# Altium PCB PCB1.pcbdoc (part 1 of 3)
Units mil, origin at the board's own origin, x right, y up, seen from the top; angles counter-clockwise.
Board outline 3947.03 x 3946.03 mil, 2 copper layers (Top Layer, Bottom Layer); 98 components, 123 nets, 499 pads, 187 vias.
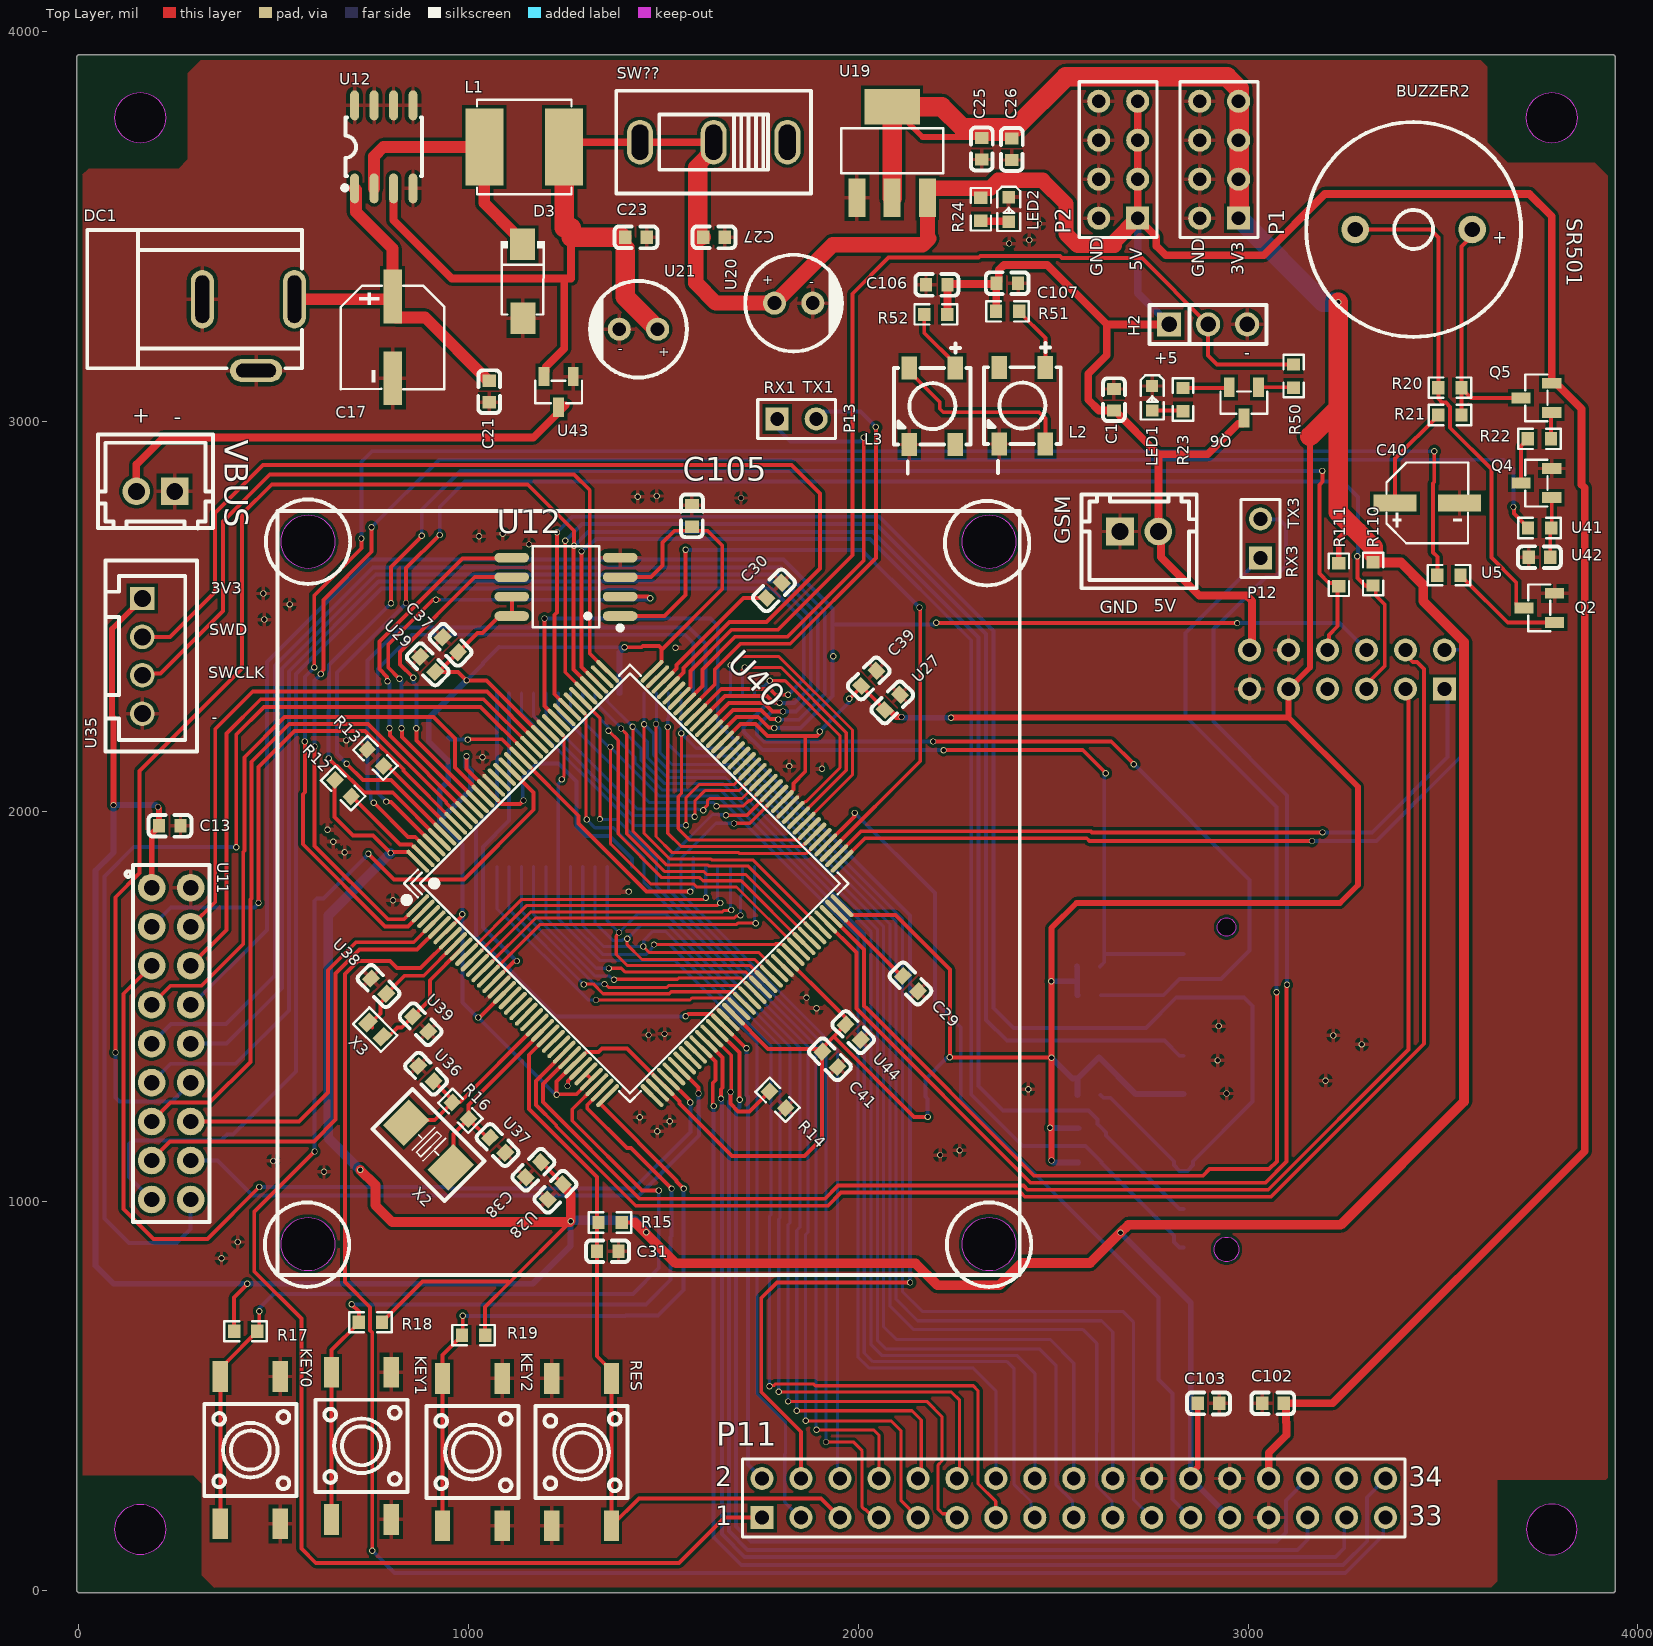
[diagram p0: Top Layer view]
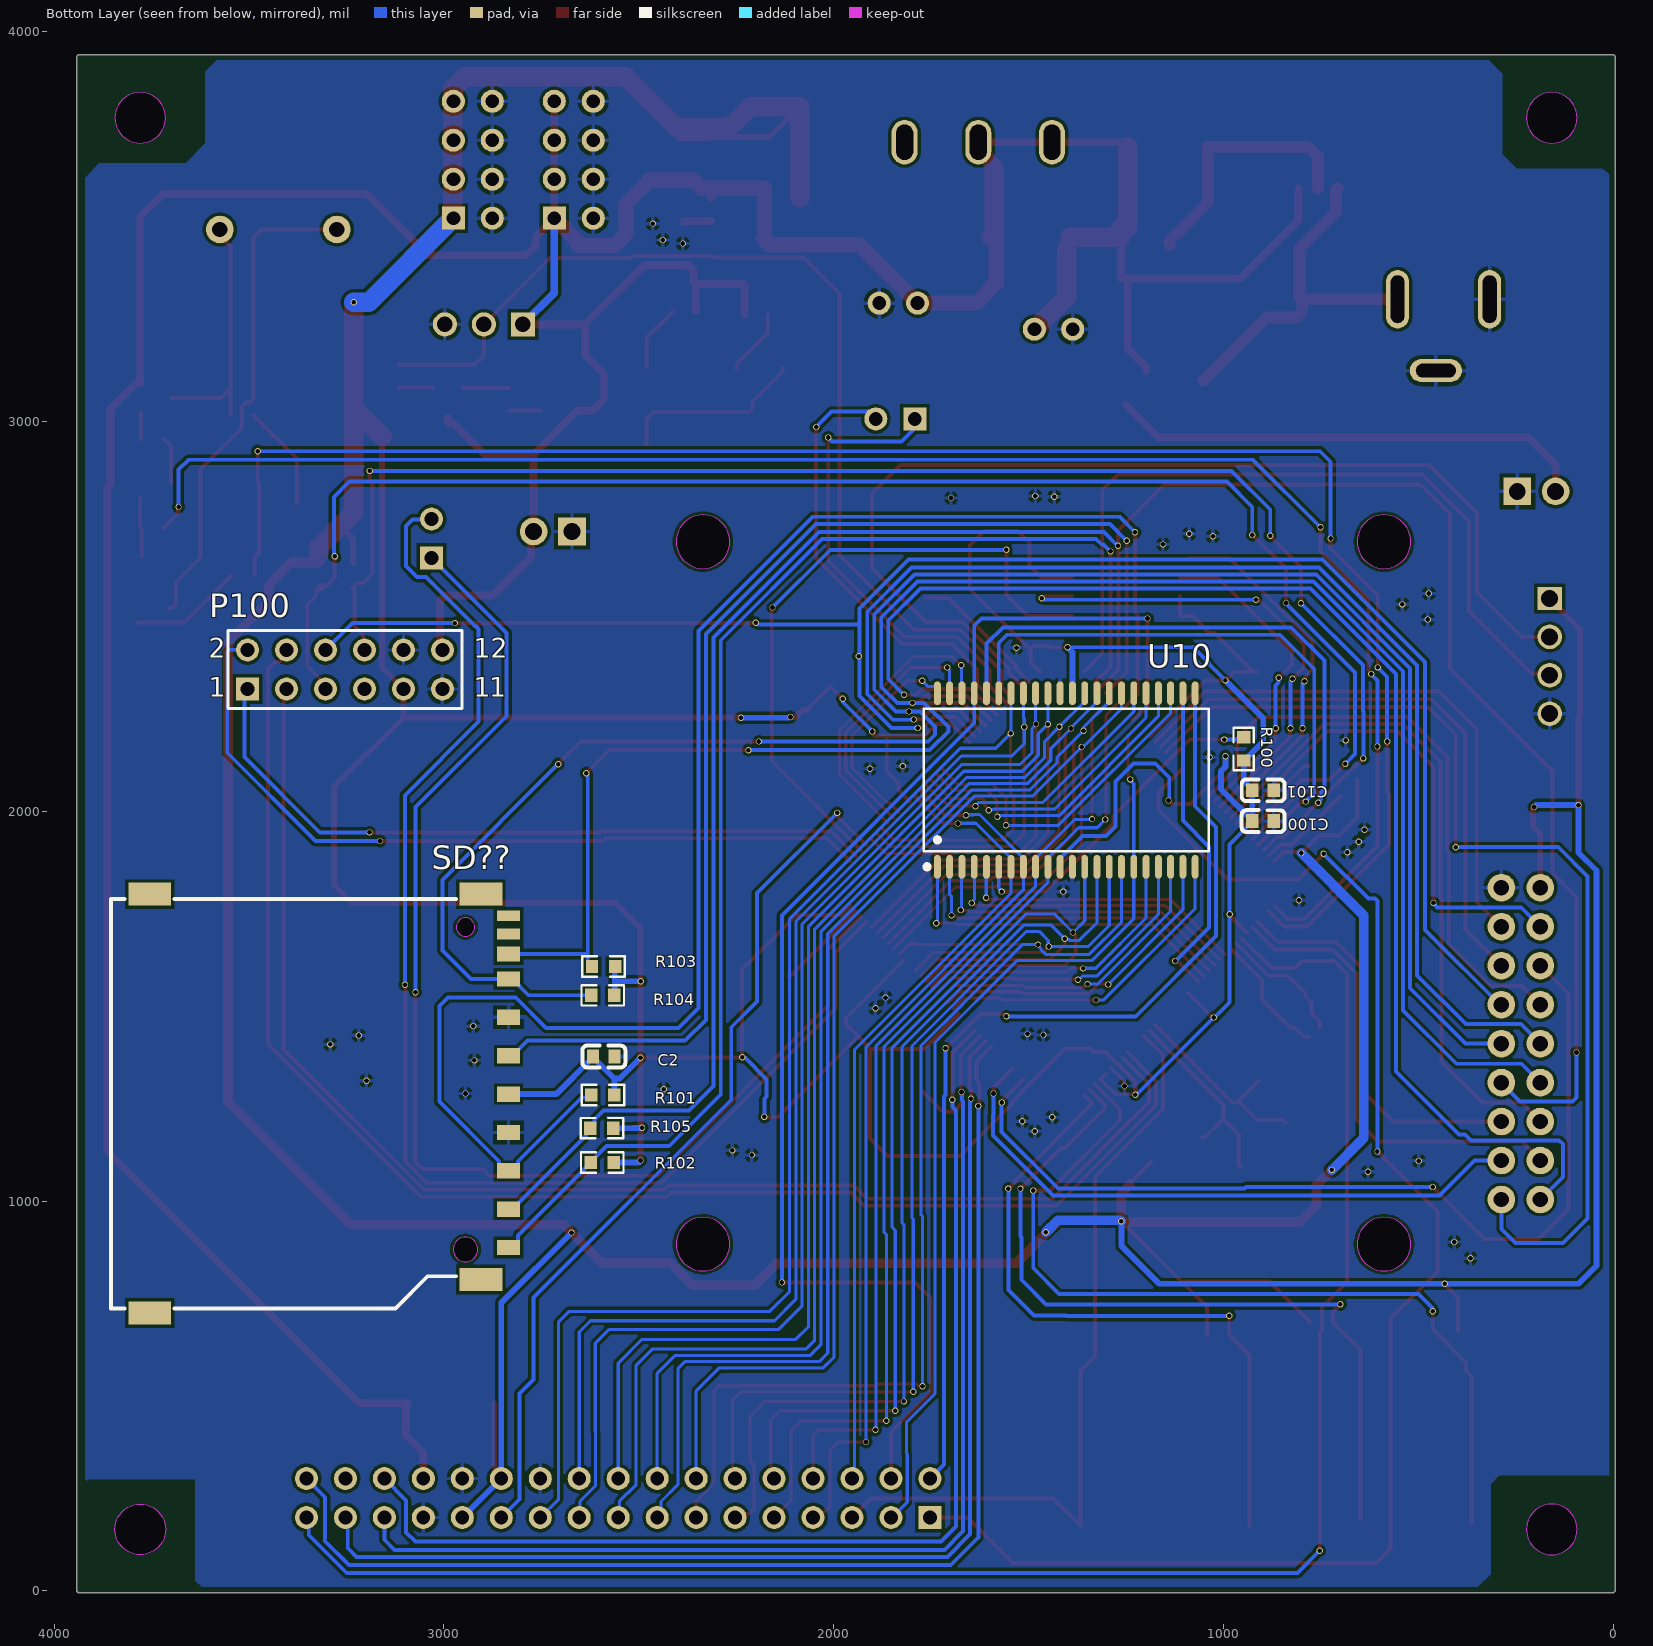
[diagram p1: Bottom Layer view, seen from below]

## Layer stack, top to bottom
Top Solder Mask Layer: solder mask 0.4, Solder Resist, Dk 3.5
Top Layer: signal copper 1.4
Dielectric1: dielectric 12.6, FR-4, Dk 4.8
Bottom Layer: signal copper 1.4
Bottom Solder Mask Layer: solder mask 0.4, Solder Resist, Dk 3.5

## Board outline
-3.01,-3.01 cw(c0,1) -5.01,1 -5.01,3936 cw(c0,3936) 0,3941.02 3937,3941.02 cw(c3937,3936) 3942.02,3936 3942.02,0 cw(c3937,0) 3937,-5.01 1,-5.01 cw(c1,0)
cut-out: 157.48,3714.57 cw(c157.48,3779.53) 92.52,3779.53 cw(c157.48,3779.53) 157.48,3844.49 cw(c157.48,3779.53) 222.44,3779.53 cw(c157.48,3779.53)
cut-out: 3779.53,3714.57 cw(c3779.53,3779.53) 3714.57,3779.53 cw(c3779.53,3779.53) 3779.53,3844.49 cw(c3779.53,3779.53) 3844.49,3779.53 cw(c3779.53,3779.53)
cut-out: 3714.57,157.48 ccw(c3779.53,157.48) 3779.53,92.52 ccw(c3779.53,157.48) 3844.49,157.48 ccw(c3779.53,157.48) 3779.53,222.44 ccw(c3779.53,157.48)
cut-out: 157.48,92.52 cw(c157.48,157.48) 92.52,157.48 cw(c157.48,157.48) 157.48,222.44 cw(c157.48,157.48) 222.44,157.48 cw(c157.48,157.48)
cut-out: 588.05,2623.06 cw(c588.05,2691.96) 519.16,2691.96 cw(c588.05,2691.96) 588.05,2760.86 cw(c588.05,2691.96) 656.95,2691.96 cw(c588.05,2691.96)
cut-out: 2335.57,2623.06 cw(c2335.57,2691.96) 2266.68,2691.96 cw(c2335.57,2691.96) 2335.57,2760.86 cw(c2335.57,2691.96) 2404.47,2691.96 cw(c2335.57,2691.96)
cut-out: 2335.57,820.54 cw(c2335.57,889.44) 2266.68,889.44 cw(c2335.57,889.44) 2335.57,958.34 cw(c2335.57,889.44) 2404.47,889.44 cw(c2335.57,889.44)
cut-out: 588.05,820.54 cw(c588.05,889.44) 519.16,889.44 cw(c588.05,889.44) 588.05,958.34 cw(c588.05,889.44) 656.95,889.44 cw(c588.05,889.44)

## Design rules (kind name [scope] priority, off if disabled: settings)
Clearance [All] p1: gap=8 ignorepadtopadclearanceinfootprint=TRUE except(0: Arc-Hole Track-Hole SMDPad-Hole THPad-Hole Via-Hole Fill-Hole Poly-Hole Region-Hole Text-Hole)
FanoutControl Fanout_Default [All] p1: bgadir=Out bgaviamode=Centered fanoutstyle=Auto fanoutdirection=Alternating viagrid=1 // Fanout_Default (Default Rule)
FanoutControl Fanout_Small [(CompPinCount < 5)] p2: bgadir=Out bgaviamode=Centered fanoutstyle=Auto fanoutdirection=OutThenIn viagrid=1 // Fanout_Small (Default Rule)
FanoutControl Fanout_LCC [IsLCC] p4: bgadir=Out bgaviamode=Centered fanoutstyle=Auto fanoutdirection=Alternating viagrid=1 // Fanout_LCC (Default Rule)
FanoutControl Fanout_BGA [IsBGA] p5: bgadir=Out bgaviamode=Centered fanoutstyle=Auto fanoutdirection=Alternating viagrid=1 // Fanout_BGA (Default Rule)
HoleSize [All] p1: absolutevalues=TRUE maxlimit=157.48 minlimit=11.81 maxpercent=80.000 minpercent=20.000
MinimumSolderMaskSliver [All] p1: minsoldermaskwidth=1.97
PolygonConnect [All] p1: connectstyle=Relief reliefconductorwidth=10 reliefentries=4 polygonreliefangle="90 Angle" airgapwidth=10
RoutingVias [All] p1: holewidth=12 width=16 viastyle="Through Hole" minholewidth=12 minwidth=16 maxholewidth=20 maxwidth=20
SilkToSilkClearance [All] p1: silktosilkclearance=6
SilkToSolderMaskClearance [IsPad] p1: minsilkscreentomaskgap=0 clearancetoexposedcopper=TRUE
SolderMaskExpansion [All] p1: expansion=4 istentingtop=FALSE
UnRoutedNet [All] p1: checkbadconnections=TRUE
Width [All] p1: maxlimit=50 minlimit=8 preferedwidth=10
21 further rules are at their usual default settings.

## Classes and differential pairs
component class 4_POW.schdoc: C17 C21 C23 C25 C26 C27 D3 DC1 GSM L1 LED2 P1 P2 R24 SW?? U12 U19 U20 U21 U43 VBUS
component class 3_语音模块.schdoc: C100 C101 C102 C103 C105 P11 P100 R100 R110 R111 U10 U12
component class 2_MCU.schdoc: C29 C30 C31 C37 C38 C39 C41 P12 P13 R12 R13 R14 R15 R16 RES U27 U28 U29 U35 U36 U37 U38 U39 U40 U44 X2 X3
component class 1_Board.schdoc: BUZZER2 C1 C2 C13 C40 C106 C107 H2 KEY0 KEY1 KEY2 L2 L3 LED1 Q2 Q4 Q5 Q6 R17 R18 R19 R20 R21 R22 R23 R50 R51 R52 R101 R102 R103 R104 R105 SD?? U5 U11 U41 U42

## Components (designator, comment, footprint, x,y, rotation, side; value= is the part's Value field where it differs from the comment)
BUZZER2 "4000Hz" BUZ-TH_BD14.0-P7.60-D0.7-FD 3425,3493 r180 top
C1 "100nF" C0603 2656,3056 r270 top
C2 "100nF" C0603 2590,1371 r0 bottom
C13 "100nF" C0603 233.44,1963 r180 top
C17 "470uF" CAP-SMD_BD6.3-L6.6-W6.6-LS7.6-RD 805,3216 r270 top
C21 "100nF" C0603 1053,3077 r90 top
C23 "100nF" C0603 1429.44,3473 r180 top
C25 "10uF" C0603 2317,3700 r90 top
C26 "100nF" C0603 2394,3698.87 r90 top
C27 "100nF" C0603 1629.56,3473 r180 top
C29 "2.2uF" C0603 2134,1558 r315 top
C30 "2.2uF" C0603 1784,2567 r45 top
C31 "100nF" C0603 1357.08,871.13 r0 top
C37 "100nF" C0603 953.58,2427.49 r135 top
C38 "100nF" C0603 1166.1,1080.34 r225 top
C39 "100nF" C0603 2027,2341 r45 top
C40 "RST47UF16V034" CAP-SMD_BD5.0-L5.3-W5.3-LS6.0-FD 3460,2790.83 r0 top
C41 "100nF" C0603 1927.51,1363.49 r315 top
C100 "100nF" C0603 898.56,1975 r0 bottom
C101 "100nF" C0603 898.44,2054 r0 bottom
C102 "100nF" C0603 3064,481 r0 top
C103 "100nF" C0603 2898.44,481 r180 top
C105 "100nF" C0603 1573,2758 r270 top
C106 "100nF" C0603 2201.44,3351 r180 top
C107 "100nF" C0603 2382.44,3355 r0 top
D3 "SS34" SMA_L4.3-W2.6-LS5.0-RD 1139,3360 r270 top
DC1 "DC-005-A200" DC-IN-TH_DC-005-A200 435.1,3222.45 r0 top
GSM "ZX-XH2.54-2PZZ" CONN-TH_2P-P2.50_HX25003-2A 2720.79,2718 r0 top
H2 "PM254V-11-03-H85" HDR-TH_3P-P2.54-V-F 2897.68,3249.43 r0 top
KEY0 "K2-6639SP-C4SC-04" KEY-SMD_4P-L6.0-W6.0-P3.90-LS10.0 440,360.89 r270 top
KEY1 "K2-6639SP-C4SC-04" KEY-SMD_4P-L6.0-W6.0-P3.90-LS10.0 725.22,372.02 r270 top
KEY2 "K2-6639SP-C4SC-04" KEY-SMD_4P-L6.0-W6.0-P3.90-LS10.0 1010,355.89 r270 top
L1 "68uH" IND-SMD_L6.0-W6.0_SWPA6045S 1143,3704.65 r0 top
L2 "RGB" RGB 2421,3041 r180 top
L3 "RGB" RGB 2189.95,3039.57 r180 top
LED1 "NCD0603G1" LED0603-RD 2754,3060 r270 top
LED2 "NCD0603G1" LED0603-RD 2386,3544 r270 top
P1 "Header 4X2" HDR2X4 2976,3522 r90 top
P2 "Header 4X2" HDR2X4 2717,3522 r90 top
P11 "TFTLCD" HDR2X17 1753,188 r0 top
P12 "Header 2" HDR1X2 3032,2650 r90 top
P13 "Header 2" HDR1X2 1792,3007 r0 top
P100 "Header 6X2" HDR2X6 3504,2314 r180 bottom
Q2 "SS8050" SOT-23-3_L2.9-W1.3-P1.90-LS2.4-BR 3747.37,2522 r0 top
Q4 "SS8050" SOT-23-3_L2.9-W1.3-P1.90-LS2.4-BR 3739.93,2842.41 r0 top
Q5 "SS8550" SOT-23-3_L2.9-W1.3-P1.90-LS2.4-BR 3739.93,3060.87 r0 top
Q6 "SS8050" SOT-23-3_L2.9-W1.3-P1.90-LS2.4-BR 2989.59,3048.67 r90 top
R12 "0Ω" R0603 678,2059 r135 top
R13 "10kΩ" R0603 761.05,2137.22 r135 top
R14 "10kΩ" R0603 1793,1260 r315 top
R15 "10kΩ" R0603 1363,945 r0 top
R16 "1MΩ" R0603 979.09,1231.73 r135 top
R17 "10kΩ" R0603 428,666 r180 top
R18 "10kΩ" R0603 748.34,689 r0 top
R19 "10kΩ" R0603 1013,656 r0 top
R20 "2.2kΩ" R0603 3518,3087 r0 top
R21 "330Ω" R0603 3518,3017 r0 top
R22 "1kΩ" R0603 3747.75,2955.87 r0 top
R23 "1kΩ" R0603 2833.24,3056.5 r90 top
R24 "1.5kΩ" R0603 2314.55,3544.87 r90 top value=1kΩ
R50 "1kΩ" R0603 3117,3117 r90 top
R51 "1kΩ" R0603 2383,3283 r180 top
R52 "1kΩ" R0603 2199,3275 r0 top
R100 "10kΩ" R0603 948,2160 r90 bottom
R101 "47k" R0603 2592.34,1272 r180 bottom value=2kΩ
R102 "47k" R0603 2594,1099 r180 bottom value=2kΩ
R103 "47k" R0603 2590.66,1602 r180 bottom value=2kΩ
R104 "47k" R0603 2592.66,1528 r180 bottom value=2kΩ
R105 "47k" R0603 2595,1187 r180 bottom value=2kΩ
R110 "4.7kΩ" R0603 3321,2609 r90 top
R111 "4.7kΩ" R0603 3233,2607 r90 top
RES "K2-6639SP-C4SC-04" KEY-SMD_4P-L6.0-W6.0-P3.90-LS10.0 1290,355.89 r270 top
SD?? "SD-112" PCBComponent_1 3294.81,1250 r270 bottom
SW?? "SS12D10G4 071" 3PINSW 1629.01,3717 r180 top
U5 "2kΩ" R0603 3515.62,2605.87 r180 top
U10 "IS62WV51216BLL-55TLI" SRAM 1732.98,2303 r180 bottom
U11 "PM254-2-09-Z-8.5" HDR-TH_18P-P2.54-V-F-R2-C9-S2.54 237,1404 r270 top
U12 "W25Q128JVSIQ" eeprom 1250,2576 r90 top
U12 "XL1509-5.0E1" SOIC-8_L5.0-W4.0-P1.27-LS6.0-BL 782.53,3704.87 r0 top
U19 "AMS1117-3.3" SOT-223-3_L6.5-W3.4-P2.30-LS7.0-BR 2087,3691 r270 top
U20 "10uF" CAP-TH_BD6.3-P2.50-D0.5-FD 1834,3304 r0 top
U21 "10uF" CAP-TH_BD6.3-P2.50-D0.5-FD 1436,3237 r180 top
U27 "10uF" C0603 2087.51,2279.51 r45 top
U28 "10uF" C0603 1222.67,1023.77 r225 top
U29 "10uF" C0603 895.3,2377.35 r135 top
U35 "ZX-XH2.54-4PZZ" CONN-TH_4P-P2.50_4PIN 163,2398.36 r270 top
U36 "18pF" C0603 890.71,1327.19 r135 top
U37 "18pF" C0603 1074.55,1143.35 r315 top
U38 "18pF" C0603 769.11,1551.36 r315 top
U39 "18pF" C0603 876.8,1454.23 r135 top
U40 "STM32F407ZET6" LQFP-144_L20.0-W20.0-P0.50-LS22.0-BL 1414,1815 r315 top locked
U41 "2kΩ" R0603 3748,2727 r180 top
U42 "10nF" C0603 3748,2652 r0 top
U43 "SI2301-ZE" SOT-23-3_L2.9-W1.3-P1.90-LS2.4-BR 1231,3076 r90 top
U44 "10uF" C0603 1986.94,1433.19 r315 top
VBUS "ZX-XH2.54-2PZZ" CONN-TH_2P-P2.50_HX25003-2A 196.79,2821 r180 top
X2 "8MHz" OSC-SMD_L5.0-W3.2 897.27,1143.85 r135 top
X3 "-" OSC-SMD_2P-L1.6-W1.0 760.31,1439.95 r315 top

## Footprints (in the part's own frame and the unit in brackets; to place one, negate y for a bottom-side part, rotate by r counter-clockwise, add the part's x,y. Pads: shape width x height; smd on the part's side, far side on the other; paste and mask are expansions set on the pad)
3PINSW [mm]
  oval 1.7x2.9 hole 1.1 slot 2.3 at 90 deg paste+0 mask+0.05: 1(-4.8,0) 2(0,0) 3(4.8,0)
  silkscreen extent -6.35,-3.35 6.35,3.35
BUZ-TH_BD14.0-P7.60-D0.7-FD [mm]
  round 1.8 hole 1: 1(-3.81,0) 2(3.81,0)
  silkscreen extent -7,-7 7,7
C0603 [mm]
  rect 0.8x0.9 smd: 1(-0.7,0) 2(0.7,0)
  silkscreen extent -1.41,-0.71 1.39,0.72
CAP-SMD_BD5.0-L5.3-W5.3-LS6.0-FD [mm]
  rect 2.8x1.1 smd: 1(-2.1,0) 2(2.1,0)
  silkscreen extent -2.66,-2.62 2.66,2.65
CAP-SMD_BD6.3-L6.6-W6.6-LS7.6-RD [mm]
  rect 3.5x1.2 smd: 1(-2.67,0) 2(2.67,0)
  silkscreen extent -3.38,-3.38 3.38,3.38
CAP-TH_BD6.3-P2.50-D0.5-FD [mm]
  round 1.5 hole 0.9 paste+0 mask+0.05: 1(-1.25,0) 2(1.25,0)
  silkscreen extent -3.15,-3.15 3.21,3.15
CONN-TH_2P-P2.50_HX25003-2A [mm]
  rect 1.8x1.8 hole 1.1 paste+0 mask+0.05: 1(-1.25,0)
  round 1.8 hole 1.1 paste+0 mask+0.05: 2(1.25,0)
  silkscreen extent -3.75,-3.7 3.75,2.41
CONN-TH_4P-P2.50_4PIN [mm]
  rect 1.524x1.6 hole 1.1: 1(-3.75,0)
  round 1.6 hole 1.1: 2(-1.25,0) 3(1.25,0) 4(3.75,0)
  silkscreen extent -6.22,-2.41 6.22,3.56
DC-IN-TH_DC-005-A200 [mm]
  oval 1.5x3.8 hole 0.9 slot 3.1 at 90 deg: 1(3,2.325) 2(-3,2.325)
  oval 3.4x1.5 hole 0.9 slot 2.6 at 0 deg: 3(0.5,-2.325)
  silkscreen extent -10.5,-2.17 3.5,6.83
eeprom [mm]
  oval 0.63x2.25 smd: 1(-1.905,-3.53) 2(-0.635,-3.53) 3(0.635,-3.53) 4(1.905,-3.53) 5(1.905,3.53) 6(0.635,3.53) 7(-0.635,3.53) 8(-1.905,3.53)
  silkscreen extent -2.82,-3.68 2.64,2.18
HDR1X2 [mm] "Connector; Header; 2 Position"
  rect 1.5x1.5 hole 0.9: 1(0,0)
  round 1.5 hole 0.9: 2(2.54,0)
  silkscreen extent -1.27,-1.27 3.81,1.27
HDR2X4 [mm] "Connector; Header; 4x2 Position"
  rect 1.5x1.5 hole 0.9: 1(0,0)
  round 1.5 hole 0.9: 2(0,2.54) 3(2.54,0) 4(2.54,2.54) 5(5.08,0) 6(5.08,2.54) 7(7.62,0) 8(7.62,2.54)
  silkscreen extent -1.27,-1.27 8.89,3.81
HDR2X6 [mm] "Connector; Header; 6x2 Position"
  rect 1.5x1.5 hole 0.9: 1(0,0)
  round 1.5 hole 0.9: 2(0,2.54) 3(2.54,0) 4(2.54,2.54) 5(5.08,0) 6(5.08,2.54) 7(7.62,0) 8(7.62,2.54) 9(10.16,0) 10(10.16,2.54) 11(12.7,0) 12(12.7,2.54)
  silkscreen extent -1.27,-1.27 13.97,3.81
HDR2X17 [mm] "Connector; Header; 17x2 Position"
  rect 1.5x1.5 hole 0.9: 1(0,0)
  round 1.5 hole 0.9: 2(0,2.54) 3(2.54,0) 4(2.54,2.54) 5(5.08,0) 6(5.08,2.54) 7(7.62,0) 8(7.62,2.54) 9(10.16,0) 10(10.16,2.54) 11(12.7,0) 12(12.7,2.54) 13(15.24,0) 14(15.24,2.54) 15(17.78,0) 16(17.78,2.54) 17(20.32,0) 18(20.32,2.54) 19(22.86,0) 20(22.86,2.54) 21(25.4,0) 22(25.4,2.54) 23(27.94,0) 24(27.94,2.54) 25(30.48,0) 26(30.48,2.54) 27(33.02,0) 28(33.02,2.54) 29(35.56,0) 30(35.56,2.54) 31(38.1,0) 32(38.1,2.54) 33(40.64,0) 34(40.64,2.54)
  silkscreen extent -1.27,-1.27 41.91,3.81
HDR-TH_3P-P2.54-V-F [mil]
  rect 62x62 hole 40.16: 1(-100,0)
  round 62 hole 40.16: 2(0,0) 3(100,0)
  silkscreen extent -150,-50 150,50
HDR-TH_18P-P2.54-V-F-R2-C9-S2.54 [mm]
  round 1.8 hole 1: 1(-10.16,-1.27) 2(-10.16,1.27) 3(-7.62,-1.27) 4(-7.62,1.27) 5(-5.08,-1.27) 6(-5.08,1.27) 7(-2.54,-1.27) 8(-2.54,1.27) 9(0,-1.27) 10(0,1.27) 11(2.54,-1.27) 12(2.54,1.27) 13(5.08,-1.27) 14(5.08,1.27) 15(7.62,-1.27) 16(7.62,1.27) 17(10.16,-1.27) 18(10.16,1.27)
  silkscreen extent -11.63,-2.97 11.63,2.5
IND-SMD_L6.0-W6.0_SWPA6045S [mm]
  rect 2.474x5.02 smd: 1(-2.603,0) 2(2.603,0)
  silkscreen extent -3.08,-3.08 3.08,3.08
KEY-SMD_4P-L6.0-W6.0-P3.90-LS10.0 [mm]
  rect 2x1 smd: 1(-4.8,1.95) 2(4.8,1.95) 3(-4.8,-1.95) 4(4.8,-1.95)
  silkscreen extent -3,-3 3,3
LED0603-RD [mm]
  rect 0.8x0.8 smd: 1(-0.799,-0.003) 2(0.799,0.003)
  silkscreen extent -1.49,-0.75 1.39,0.76
LQFP-144_L20.0-W20.0-P0.50-LS22.0-BL [mm]
  oval 0.28x2 smd: 1(-8.75,-10.8) 2(-8.25,-10.8) 3(-7.75,-10.8) 4(-7.25,-10.8) 5(-6.75,-10.8) 6(-6.25,-10.8) 7(-5.75,-10.8) 8(-5.25,-10.8) 9(-4.75,-10.8) 10(-4.25,-10.8) 11(-3.75,-10.8) 12(-3.25,-10.8) 13(-2.75,-10.8) 14(-2.25,-10.8) 15(-1.75,-10.8) 16(-1.25,-10.8) 17(-0.75,-10.8) 18(-0.25,-10.8) 19(0.25,-10.8) 20(0.75,-10.8) 21(1.25,-10.8) 22(1.75,-10.8) 23(2.25,-10.8) 24(2.75,-10.8) 25(3.25,-10.8) 26(3.75,-10.8) 27(4.25,-10.8) 28(4.75,-10.8) 29(5.25,-10.8) 30(5.75,-10.8) 31(6.25,-10.8) 32(6.75,-10.8) 33(7.25,-10.8) 34(7.75,-10.8) 35(8.25,-10.8) 36(8.75,-10.8) 73(8.75,10.8) 74(8.25,10.8) 75(7.75,10.8) 76(7.25,10.8) 77(6.75,10.8) 78(6.25,10.8) 79(5.75,10.8) 80(5.25,10.8) 81(4.75,10.8) 82(4.25,10.8) 83(3.75,10.8) 84(3.25,10.8) 85(2.75,10.8) 86(2.25,10.8) 87(1.75,10.8) 88(1.25,10.8) 89(0.75,10.8) 90(0.25,10.8) 91(-0.25,10.8) 92(-0.75,10.8) 93(-1.25,10.8) 94(-1.75,10.8) 95(-2.25,10.8) 96(-2.75,10.8) 97(-3.25,10.8) 98(-3.75,10.8) 99(-4.25,10.8) 100(-4.75,10.8) 101(-5.25,10.8) 102(-5.75,10.8) 103(-6.25,10.8) 104(-6.75,10.8) 105(-7.25,10.8) 106(-7.75,10.8) 107(-8.25,10.8) 108(-8.75,10.8)
  oval 2x0.28 smd: 37(10.8,-8.75) 38(10.8,-8.25) 39(10.8,-7.75) 40(10.8,-7.25) 41(10.8,-6.75) 42(10.8,-6.25) 43(10.8,-5.75) 44(10.8,-5.25) 45(10.8,-4.75) 46(10.8,-4.25) 47(10.8,-3.75) 48(10.8,-3.25) 49(10.8,-2.75) 50(10.8,-2.25) 51(10.8,-1.75) 52(10.8,-1.25) 53(10.8,-0.75) 54(10.8,-0.25) 55(10.8,0.25) 56(10.8,0.75) 57(10.8,1.25) 58(10.8,1.75) 59(10.8,2.25) 60(10.8,2.75) 61(10.8,3.25) 62(10.8,3.75) 63(10.8,4.25) 64(10.8,4.75) 65(10.8,5.25) 66(10.8,5.75) 67(10.8,6.25) 68(10.8,6.75) 69(10.8,7.25) 70(10.8,7.75) 71(10.8,8.25) 72(10.8,8.75) 109(-10.8,8.75) 110(-10.8,8.25) 111(-10.8,7.75) 112(-10.8,7.25) 113(-10.8,6.75) 114(-10.8,6.25) 115(-10.8,5.75) 116(-10.8,5.25) 117(-10.8,4.75) 118(-10.8,4.25) 119(-10.8,3.75) 120(-10.8,3.25) 121(-10.8,2.75) 122(-10.8,2.25) 123(-10.8,1.75) 124(-10.8,1.25) 125(-10.8,0.75) 126(-10.8,0.25) 127(-10.8,-0.25) 128(-10.8,-0.75) 129(-10.8,-1.25) 130(-10.8,-1.75) 131(-10.8,-2.25) 132(-10.8,-2.75) 133(-10.8,-3.25) 134(-10.8,-3.75) 135(-10.8,-4.25) 136(-10.8,-4.75) 137(-10.8,-5.25) 138(-10.8,-5.75) 139(-10.8,-6.25) 140(-10.8,-6.75) 141(-10.8,-7.25) 142(-10.8,-7.75) 143(-10.8,-8.25) 144(-10.8,-8.75)
  silkscreen extent -10.41,-11.25 10.08,10.08
OSC-SMD_2P-L1.6-W1.0 [mm]
  rect 0.8x1.06 smd: 1(-0.66,0) 2(0.66,0)
  silkscreen extent -1.29,-0.76 1.29,0.76
OSC-SMD_L5.0-W3.2 [mm]
  rect 1.9x2.4 smd: 1(-2.05,0) 2(2.05,0)
  silkscreen extent -3.32,-1.85 3.33,1.85
PCBComponent_1 [mm]
  rect 1x1.5 smd: 1(6.88,11.69) 2(4.38,11.69) 3(1.88,11.69) 4(-0.62,11.69) 5(-3.12,11.69) 6(-5.62,11.69) 7(-8.12,11.69) 8(-9.75,11.69) 9(9.38,11.69)
  rect 0.7x1.5 smd: 10(-11.05,11.69) 11(-12.25,11.69)
  rect 1.5x2.8 smd: 12(-13.65,-11.69) 12(-13.65,9.89) 12(11.455,9.89) 12(13.65,-11.69)
  Board Outline Layer board cut-out: -10.9,8.89 -10.902,9.008 -10.995,9.226 -11.163,9.392 -11.382,9.482 -11.618,9.482 -11.837,9.392 -12.006,9.226 -12.098,9.008 -12.1,8.89 -12.098,8.772 -12.006,8.554 -11.837,8.388 -11.618,8.298 -11.382,8.298 -11.163,8.388 -10.995,8.554 -10.902,8.772 -10.9,8.89 -10.9,8.89
  Board Outline Layer board cut-out: 10.3,8.89 10.3,8.995 10.246,9.199 10.14,9.381 9.991,9.53 9.809,9.635 9.605,9.69 9.395,9.69 9.191,9.635 9.009,9.53 8.86,9.381 8.755,9.199 8.7,8.995 8.7,8.89 8.7,8.785 8.755,8.581 8.86,8.399 9.009,8.25 9.191,8.144 9.395,8.09 9.605,8.09 9.809,8.144 9.991,8.25 10.14,8.399 10.246,8.581 10.3,8.785 10.3,8.89 10.3,8.89
  Multi-Layer pour cut-out: -10.9,8.89 -10.902,9.008 -10.995,9.226 -11.163,9.392 -11.382,9.482 -11.618,9.482 -11.837,9.392 -12.006,9.226 -12.098,9.008 -12.1,8.89 -12.098,8.772 -12.006,8.554 -11.837,8.388 -11.618,8.298 -11.382,8.298 -11.163,8.388 -10.995,8.554 -10.902,8.772 -10.9,8.89 -10.9,8.89
  Multi-Layer pour cut-out: 10.3,8.89 10.3,8.995 10.246,9.199 10.14,9.381 9.991,9.53 9.809,9.635 9.605,9.69 9.395,9.69 9.191,9.635 9.009,9.53 8.86,9.381 8.755,9.199 8.7,8.995 8.7,8.89 8.7,8.785 8.755,8.581 8.86,8.399 9.009,8.25 9.191,8.144 9.395,8.09 9.605,8.09 9.809,8.144 9.991,8.25 10.14,8.399 10.246,8.581 10.3,8.785 10.3,8.89 10.3,8.89
  silkscreen extent -13.35,-14.22 13.35,8.26
R0603 [mil]
  rect 31.75x34.02 smd paste-3937.01 mask+2: 1(-29.66,0) 2(29.66,0)
  silkscreen extent -55,-26 55,26
RGB [mm]
  rect 1x1.5 smd: 1(-1.5,-2.5) 2(1.5,-2.5) 3(1.5,2.5) 4(-1.5,2.5)
  silkscreen extent -2.5,-4.1 2.5,4.4
SMA_L4.3-W2.6-LS5.0-RD [mm]
  rect 2.046x1.62 smd: 1(-2.404,-0.009) 2(2.404,0.009)
  silkscreen extent -2.61,-1.44 2.16,1.44
SOIC-8_L5.0-W4.0-P1.27-LS6.0-BL [mil]
  oval 22.38x76.78 smd: 1(-75,-106.5) 2(-25,-106.5) 3(25,-106.5) 4(75,-106.5) 5(75,106.5) 6(25,106.5) 7(-25,106.5) 8(-75,106.5)
  silkscreen extent -106,-111 98,75
SOT-23-3_L2.9-W1.3-P1.90-LS2.4-BR [mm]
  rect 1.25x0.7 smd: 1(1,-0.95) 2(1,0.95) 3(-1,0)
  silkscreen extent -0.73,-1.53 0.73,1.53
SOT-223-3_L6.5-W3.4-P2.30-LS7.0-BR [mm]
  rect 2.5x1.1 smd: 1(2.97,-2.3) 2(2.97,0) 3(2.97,2.3)
  rect 2.34x3.6 smd: 4(-2.97,0)
  silkscreen extent -1.57,-3.33 1.37,3.33
SRAM [mil]
  oval 17.64x61.06 smd: 1(-0.99,-445.32) 2(30.51,-445.32) 3(62,-445.32) 4(93.5,-445.32) 5(125,-445.32) 6(156.49,-445.32) 7(187.99,-445.32) 8(219.48,-445.32) 9(250.98,-445.32) 10(282.48,-445.32) 11(313.97,-445.32) 12(345.47,-445.32) 13(376.96,-445.32) 14(408.46,-445.32) 15(439.96,-445.32) 16(471.45,-445.32) 17(502.95,-445.32) 18(534.44,-445.32) 19(565.94,-445.32) 20(597.44,-445.32) 21(628.93,-445.32) 22(660.43,-445.32) 23(660.43,0) 24(628.93,0) 25(597.44,0) 26(565.94,0) 27(534.44,0) 28(502.95,0) 29(471.45,0) 30(439.96,0) 31(408.46,0) 32(376.96,0) 33(345.47,0) 34(313.97,0) 35(282.48,0) 36(250.98,0) 37(219.48,0) 38(187.99,0) 39(156.49,0) 40(125,0) 41(93.5,0) 42(62,0) 43(30.51,0) 44(-0.99,0)
  silkscreen extent -36,-451 695,-40

## Part data
BUZZER2: library part SFN-1407PA7.6, "驱动方式:无源(外部驱动);构造类型:压电式;额定电压:-;工作电压:-;消耗电流:-;频率:4000Hz;声压(SPL):85dB@5V,10cm;直径(φD):14mm;长度:-;宽度:-;高度:7.5mm;工作温度:-;", Current Consumption=-, JLCPCB Part Class=扩展库, LCSC Part Name=压电无源蜂鸣器, Manufacturer=S&amp;S(海旭), Add into BOM=yes, Convert to PCB=yes, Datasheet=https://atta.szlcsc.com/upload/public/pdf/source/20190422/C360603_0050A9658ADA60D80C9948846F925782.pdf, Device=SFN-1407PA7.6, Diameter (φD)=14mm, Height=7.5mm, Length=-, Manufacturer Part=SFN-1407PA7.6, Name=4000Hz, Operating Temperature=-, Operating Voltage=-, Oscillator Circuit=无源(外部驱动), Rated Voltage=-, Sound Pressure Level (SPL)=85dB@5V,10cm, Supplier=LCSC, Supplier Footprint=插件,P=7.6mm, Supplier Part=C360603, Symbol=SFN-1407PA7.6, Technology Type=压电式, Width=-
C1 C2 C13 C106 C107: library part 0603B104K500NT, "容值:100nF;精度:±10%;额定电压:50V;材质(温度系数):X7R;", JLCPCB Part Class=扩展库, LCSC Part Name="100nF ±10% 50V", Manufacturer=FH(风华), Temperature Coefficient=X7R, Tolerance=±10%, Voltage Rated=50V, Add into BOM=yes, Convert to PCB=yes, Datasheet=https://atta.szlcsc.com/upload/public/pdf/source/20170923/C30926_1506149436298988724.pdf, Device=0603B104K500NT, Manufacturer Part=0603B104K500NT, Name=100nF, Supplier=LCSC, Supplier Footprint=0603, Supplier Part=C30926, Symbol=0603B104K500NT
C17: library part RVT1C471M0607, "容值:470uF;精度:±20%;额定电压:16V;电容体直径:6.3mm;电容体长度:7.7mm;工作寿命:2000hrs@105℃;工作温度:-55℃~+105℃;", JLCPCB Part Class=扩展库, LCSC Part Name="470uF ±20% 16V", Lifetime @ Temp=2000hrs@105℃, Manufacturer=ROQANG(容强), Operating Temperature=-55℃~+105℃, Rated Voltage=16V, Tolerance=±20%, Add into BOM=yes, Convert to PCB=yes, Device=RVT1C471M0607, L=7.7mm, Manufacturer Part=RVT1C471M0607, Name=470uF, Supplier=LCSC, Supplier Footprint=SMD,6.3x7.7mm, Supplier Part=C2977552, Symbol=RVT1C471M0607, φD=6.3mm
C21 C23 C26 C27 C31 C37 C38 C39 C41 C100 C101 C102 C103 C105: library part CGA3E3X8R1H104M080AE, "容值:100nF;精度:±20%;额定电压:50V;材质(温度系数):X8R;", LCSC Part Name="100nF ±20% 50V", Manufacturer=TDK, Temperature Coefficient=X8R, Tolerance=±20%, Voltage Rated=50V, Add into BOM=yes, Convert to PCB=yes, Device=CGA3E3X8R1H104M080AE, Manufacturer Part=CGA3E3X8R1H104M080AE, Name=100nF, Supplier=LCSC, Supplier Footprint=0603, Supplier Part=C3855738, Symbol=CGA3E3X8R1H104M080AE
C25: library part C1608X6S0J106M080AC, "容值:10uF;精度:±20%;额定电压:6.3V;材质(温度系数):X6S;", LCSC Part Name="10uF ±20% 6.3V", Manufacturer=TDK, Temperature Coefficient=X6S, Tolerance=±20%, Voltage Rated=6.3V, Add into BOM=yes, Convert to PCB=yes, Datasheet=https://atta.szlcsc.com/upload/public/pdf/source/20221212/519F8C46C56E78A46759B3245CB4AD37.pdf, Device=C1608X6S0J106M080AC, Manufacturer Part=C1608X6S0J106M080AC, Name=10uF, Supplier=LCSC, Supplier Footprint=0603, Supplier Part=C314596, Symbol=C1608X6S0J106M080AC_C314596-1
C29 C30: library part C1608X6S1A225K080AB, "容值:2.2uF;精度:±10%;额定电压:10V;材质(温度系数):X6S;", LCSC Part Name="2.2uF ±10% 10V", Manufacturer=TDK, Temperature Coefficient=X6S, Tolerance=±10%, Voltage Rated=10V, Add into BOM=yes, Convert to PCB=yes, Device=C1608X6S1A225K080AB, Manufacturer Part=C1608X6S1A225K080AB, Name=2.2uF, Supplier=LCSC, Supplier Footprint=0603, Supplier Part=C3888161, Symbol=C1608X6S1A225K080AB
C40: "RST宽温通用品 105℃2000小时 等同RVT VT XT系列贴片电解电容", Capacitance=47uF, JLCPCB Part Class=扩展库, LCSC Part Name="贴片型铝电解电容 47uF ±20% 16V", Manufacturer=KNSCHA(科尼盛), Add into BOM=yes, Convert to PCB=yes, Device=RST47UF16V034, Manufacturer Part=RST47UF16V034, Name=RST47UF16V034, Supplier=LCSC, Supplier Footprint=SMD,5x5.4mm, Supplier Part=C4747957, Symbol=RST47UF16V034
D3: JLCPCB Part Class=扩展库, Add into BOM=yes, Convert to PCB=yes, Datasheet=2022-07-04/534833A/5ff3008f79ea4c6ab22b1f3463cee262/20210714020425519.pdf, Device=SS34, LCSC Part Name=SS34, Manufacturer Part=SS34, Name=SS34, Supplier=LCSC, Supplier Footprint=SMA,DO-214AC, Supplier Part=C9900023345, Symbol=SS34_C9900023345
DC1: "DC-005 外径6.4 内芯2.0 3A电流 DC电源插座", JLCPCB Part Class=扩展库, Manufacturer=XUNPU(讯普), Add into BOM=yes, Convert to PCB=yes, Datasheet=https://atta.szlcsc.com/upload/public/pdf/source/20200812/C720557_2286DFCD6C75B71AF905731F627ABF3A.pdf, Device=DC-005-A200, LCSC Part Name=DC-005-A200, Manufacturer Part=DC-005-A200, Name=DC-005-A200, Supplier=LCSC, Supplier Footprint=14×9.0×11.0mm, Supplier Part=C720557, Symbol=DC-005-A200
GSM VBUS: "参考系列:XH;间距:2.54mm;插针结构:1x2P;排数:1;每排PIN数:2;行距:-;公母:公型插针;安装方式:直插;额定电流:3A;触头材质:黄铜;触头镀层:锡;工作温度范围:-25℃~+85℃;焊接温度(最大值):260℃;", Current Rating (Max)=3A, JLCPCB Part Class=扩展库, LCSC Part Name="系列:XH 间距:2.54mm 1x2P 直插", Manufacturer=Megastar(兆星), Operating Temperature Range=-25℃~+85℃, Welding Temperature (Max)=260℃, Add into BOM=yes, Contact Material=黄铜, Contact Plating=锡, Convert to PCB=yes, Datasheet=https://atta.szlcsc.com/upload/public/pdf/source/20230619/19BA6947230AA44A04D3EDD65E618FD0.pdf, Device=ZX-XH2.54-2PZZ, Gender=公型插针, Manufacturer Part=ZX-XH2.54-2PZZ, Mounting Style=直插, Name=ZX-XH2.54-2PZZ, Number of PINs Per Row=2, Number of Rows=1, Pins Structure=1x2P, Pitch=2.54mm, Reference Series=XH, Row Spacing=-, Supplier=LCSC, Supplier Footprint=插件,P=2.54mm, Supplier Part=C7429632, Symbol=ZX-XH2.54-2PZZ
H2: "排数:单排;总孔位数:3P;间距:2.54mm;插孔结构:1x3P;行距:-;安装类型:直插;塑高:-;触头材质:黄铜;触头镀层:-;", JLCPCB Part Class=扩展库, LCSC Part Name="间距:2.54mm 1x3P 直插", Manufacturer=XFCN(兴飞), Add into BOM=yes, Contact Material=黄铜, Contact Plating=-, Convert to PCB=yes, Datasheet=https://atta.szlcsc.com/upload/public/pdf/source/20200518/C541849_85853D71FC67C51915A806977A588FDA.pdf, Device=PM254V-11-03-H85, Holes Structure=1x3P, Insulation Height=-, Manufacturer Part=PM254V-11-03-H85, Mounting Type=直插, Name=PM254V-11-03-H85, Number of Holes=3P, Number of Rows=单排, Pitch=2.54mm, Row Spacing=-, Supplier=LCSC, Supplier Footprint=插件,P=2.54mm, Supplier Part=C541850, Symbol=PM254V-11-03-H85
KEY0 KEY1 KEY2 RES: "触点电流:50mA;额定电压(DC):12V;绝缘电阻:100MΩ;安装方式:立贴;作用力:250gf@±30gf;机械寿命:1000000;工作温度:-25℃~+85℃;开关长度:6mm;开关宽度:6mm;开关高度:5mm;", Contact Current=50mA, Insulation Resistance=100MΩ, JLCPCB Part Class=扩展库, Manufacturer=韩国韩荣, Operating Force=250gf@±30gf, Operating Temperature=-25℃~+85℃, Voltage Rating (DC)=12V, Add into BOM=yes, Convert to PCB=yes, Datasheet=https://atta.szlcsc.com/upload/public/pdf/source/20200721/C707344_FB3B602593668C8FE1542A3F64DDEE0A.pdf, Device=K2-6639SP-C4SC-04, LCSC Part Name=K2-6639SP-C4SC-04, Manufacturer Part=K2-6639SP-C4SC-04, Mechanical Life=1000000, Mounting Sytle=立贴, Name=K2-6639SP-C4SC-04, Supplier=LCSC, Supplier Footprint=SMD, Supplier Part=C879344, Switch Height=5mm, Switch Length=6mm, Switch Width=6mm, Symbol=K2-6639SP-C4SC-04_C879344
L1: library part SWPA6045S680MT, "类型:-;电感值:68uH;精度:±20%;额定电流:1A;饱和电流(Isat):1.2A;", DC Resistance (DCR)=289mΩ, JLCPCB Part Class=扩展库, LCSC Part Name="68uH ±20% 1.2A", Manufacturer=Sunlord(顺络), Rated Current=1A, Ratings=-, Saturation Current (Isat)=1.2A, Tolerance=±20%, Add into BOM=yes, Convert to PCB=yes, Datasheet=https://atta.szlcsc.com/upload/public/pdf/source/20210916/AC798BA7E846B7D0B6818F45CD84DB0B.pdf, Device=SWPA6045S680MT, Manufacturer Part=SWPA6045S680MT, Name=68uH, Supplier=LCSC, Supplier Footprint=SMD, Supplier Part=C53663, Symbol=SWPA6045S680MT, Type=-
LED1 LED2: "发光颜色:翠绿色;功率:72mW;透镜颜色:无色透明;主波长:515nm~530nm;发光强度:330mcd~900mcd;发光角度:130°;工作温度:-30℃~+85℃;", Emitted Color=翠绿色, Forward Current=10mA, Forward Voltage (VF)=2.6V~3.6V, JLCPCB Part Class=扩展库, LCSC Part Name="翠绿 0603翠绿  正贴", Lens Color=无色透明, Manufacturer=国星光电, Operating Temperature=-30℃~+85℃, Power Dissipation=72mW, Add into BOM=yes, Convert to PCB=yes, Datasheet=https://atta.szlcsc.com/upload/public/pdf/source/20200820/C84267_04BA7703640BAC111D09F5EFB971FBF3.pdf, Device=NCD0603G1, Dominant Wavelength=515nm~530nm, Luminous Intensity=330mcd~900mcd, Manufacturer Part=NCD0603G1, Name=NCD0603G1, Supplier=LCSC, Supplier Footprint=0603, Supplier Part=C84267, Symbol=FC-D1608UGK-520D10, Viewing Angle=130°
P1 P2: "Header, 4-Pin, Dual row", LatestRevisionDate=17-Jul-2002, LatestRevisionNote="Re-released for DXP Platform.", Publisher="Altium Limited"
P11: library part "Header 17X2", "Header, 17-Pin, Dual row", LatestRevisionDate=17-Jul-2002, LatestRevisionNote="Re-released for DXP Platform.", Publisher="Altium Limited"
P12 P13: "Header, 2-Pin", LatestRevisionDate=17-Jul-2002, LatestRevisionNote="Re-released for DXP Platform.", Publisher="Altium Limited"
P100: "Header, 6-Pin, Dual row", LatestRevisionDate=17-Jul-2002, LatestRevisionNote="Re-released for DXP Platform.", Publisher="Altium Limited"
Q2 Q4 Q6: library part SS8050_C2150, "直流电流增益(hFE@Ic,Vce):200@100mA,1V;功率(Pd):300mW;集射极击穿电压(Vceo):25V;集电极电流(Ic):1.5A;晶体管类型:NPN;", Collector Current (Ic)=1.5A, Collector Cut-Off Current (Icbo)=100nA, Collector-Emitter Breakdown Voltage (Vceo)=25V, Collector-Emitter Saturation Voltage (VCE(sat)@Ic,Ib)=500mV@800mA,80mA, DC Current Gain (hFE@Ic,Vce)=200@100mA,1V, JLCPCB Part Class=基础库, LCSC Part Name="耐压:25V 电流:1.5A NPN Y1 200-350", Manufacturer=CJ(江苏长电/长晶), Operating Temperature=+150℃@(Tj), Power Dissipation (Pd)=300mW, Transition Frequency (fT)=100MHz, Add into BOM=yes, Convert to PCB=yes, Datasheet=https://atta.szlcsc.com/upload/public/pdf/source/20230322/AEE86F4B043774EFF80CAEA14A37D9E9.pdf, Device=SS8050_C2150, Manufacturer Part=SS8050, Name=SS8050, Supplier=LCSC, Supplier Footprint=SOT-23, Supplier Part=C2150, Symbol=SS8050_C2150, Transistor Type=NPN
Q5: JLCPCB Part Class=扩展库, LCSC Part Name="PNP -25V -1.5A 120-400 SOT-23", Manufacturer=Doeshare(德芯), Add into BOM=yes, Convert to PCB=yes, Datasheet=https://atta.szlcsc.com/upload/public/pdf/source/20220104/E36293975455CDB0A899354BE4C8E85F.pdf, Device=SS8550, Manufacturer Part=SS8550, Name=SS8550, Supplier=LCSC, Supplier Footprint=SOT-23, Supplier Part=C2931718, Symbol=SS8550_C2931718
R12: library part RC0603JR-130RL, "电阻类型:厚膜电阻;阻值:0Ω;精度:-;功率:100mW;", JLCPCB Part Class=扩展库, LCSC Part Name="0Ω 100mW", Manufacturer=YAGEO(国巨), Operating Temperature Range=-55℃~+155℃, Overload Voltage (Max)=75V, Power(Watts)=100mW, Temperature Coefficient=-, Add into BOM=yes, Convert to PCB=yes, Datasheet=https://atta.szlcsc.com/upload/public/pdf/source/20210615/C1512169_F749B83676031E9170C7C93785487C19.pdf, Device=RC0603JR-130RL, Manufacturer Part=RC0603JR-130RL, Name=0Ω, Supplier=LCSC, Supplier Footprint=0603, Supplier Part=C1512169, Symbol=RC0603JR-130RL, Tolerance=-, Type=厚膜电阻
R13 R14 R15 R17 R18 R19 R100: library part SCR0603J10K, "阻值:10kΩ;精度:±5%;", JLCPCB Part Class=扩展库, LCSC Part Name="10kΩ ±5%", Manufacturer=VO(翔胜), Tolerance=±5%, Add into BOM=yes, Convert to PCB=yes, Datasheet=https://atta.szlcsc.com/upload/public/pdf/source/20220513/247AF9639BA21CF93567DC289CCC6A22.pdf, Device=SCR0603J10K, Manufacturer Part=SCR0603J10K, Name=10kΩ, Supplier=LCSC, Supplier Footprint=0603, Supplier Part=C3017715, Symbol=SCR0603J10K
R16: library part CRCW06031M00JNEAC, "电阻类型:厚膜电阻;阻值:1MΩ;精度:±5%;功率:100mW;", JLCPCB Part Class=扩展库, LCSC Part Name="1MΩ ±5% 100mW", Manufacturer=VISHAY(威世), Operating Temperature Range=-55℃~+155℃, Overload Voltage (Max)=75V, Power(Watts)=100mW, Temperature Coefficient=±200ppm/℃, Tolerance=±5%, Add into BOM=yes, Convert to PCB=yes, Datasheet=https://atta.szlcsc.com/upload/public/pdf/source/20210501/3A8C68602BA6317D7357138250FC3EA2.pdf, Device=CRCW06031M00JNEAC, Manufacturer Part=CRCW06031M00JNEAC, Name=1MΩ, Supplier=LCSC, Supplier Footprint=0603, Supplier Part=C1511824, Symbol=CRCW06031M00JNEAC, Type=厚膜电阻
R20: library part SCR0603J2K2, "阻值:2.2kΩ;精度:±5%;", JLCPCB Part Class=扩展库, LCSC Part Name="2.2kΩ ±5%", Manufacturer=VO(翔胜), Tolerance=±5%, Add into BOM=yes, Convert to PCB=yes, Datasheet=https://atta.szlcsc.com/upload/public/pdf/source/20220513/247AF9639BA21CF93567DC289CCC6A22.pdf, Device=SCR0603J2K2, Manufacturer Part=SCR0603J2K2, Name=2.2kΩ, Supplier=LCSC, Supplier Footprint=0603, Supplier Part=C3017730, Symbol=SCR0603J2K2
R21: library part TC0325B3300T5F, "阻值:330Ω;精度:±0.1%;功率:100mW;温度系数:±25ppm/℃;电阻类型:薄膜电阻;", JLCPCB Part Class=扩展库, LCSC Part Name="330Ω ±0.1% 100mW 薄膜电阻", Manufacturer=UNI-ROYAL(厚声), Overload Voltage (Max)=75V, Power(Watts)=100mW, Temperature Coefficient=±25ppm/℃, Tolerance=±0.1%, Add into BOM=yes, Convert to PCB=yes, Datasheet=https://atta.szlcsc.com/upload/public/pdf/source/20220708/6ACD1707201702E70C0F417A19EB926E.pdf, Device=TC0325B3300T5F, Manufacturer Part=TC0325B3300T5F, Name=330Ω, Supplier=LCSC, Supplier Footprint=0603, Supplier Part=C2989271, Symbol=TC0325B3300T5F, Type=薄膜电阻
R22 R23 R50 R51 R52: library part SCR0603F1K, "阻值:1kΩ;精度:±1%;", JLCPCB Part Class=扩展库, LCSC Part Name="1kΩ ±1%", Manufacturer=VO(翔胜), Tolerance=±1%, Add into BOM=yes, Convert to PCB=yes, Datasheet=https://atta.szlcsc.com/upload/public/pdf/source/20220513/247AF9639BA21CF93567DC289CCC6A22.pdf, Device=SCR0603F1K, Manufacturer Part=SCR0603F1K, Name=1kΩ, Supplier=LCSC, Supplier Footprint=0603, Supplier Part=C3016283, Symbol=SCR0603F1K
R24: library part SCR0603F1K, "阻值:1.5kΩ;精度:±1%;", JLCPCB Part Class=扩展库, LCSC Part Name="1kΩ ±1%", Manufacturer=VO(翔胜), Tolerance=±1%, Add into BOM=yes, Convert to PCB=yes, Datasheet=https://atta.szlcsc.com/upload/public/pdf/source/20220513/247AF9639BA21CF93567DC289CCC6A22.pdf, Device=SCR0603F1K, Manufacturer Part=SCR0603F1K, Name=Value, Supplier=LCSC, Supplier Footprint=0603, Supplier Part=C3016283, Symbol=SCR0603F1K
R101 R102 R103 R104 R105: library part RTX032001BETP, "阻值:47kΩ;精度:±0.1%;", LCSC Part Name="2kΩ ±0.1%", Manufacturer=RALEC(旺诠), Temperature Coefficient=±50ppm/℃, Tolerance=±0.1%, Add into BOM=yes, Convert to PCB=yes, Datasheet=https://atta.szlcsc.com/upload/public/pdf/source/20220822/046AFDAF81466BFF443BF7BC902F6DB1.pdf, Device=RTX032001BETP, Manufacturer Part=RTX032001BETP, Name=2kΩ, Supplier=LCSC, Supplier Footprint=0603, Supplier Part=C5141181, Symbol=RTX032001BETP
R110 R111: library part AR03FTDX4701A, "电阻类型:薄膜电阻;阻值:4.7kΩ;精度:±1%;功率:100mW;", JLCPCB Part Class=扩展库, LCSC Part Name="4.7kΩ ±1% 100mW", Manufacturer=Viking(光颉), Operating Temperature Range=-55℃~+155℃, Overload Voltage (Max)=75V, Power(Watts)=100mW, Temperature Coefficient=±50ppm/℃, Tolerance=±1%, Add into BOM=yes, Convert to PCB=yes, Datasheet=https://atta.szlcsc.com/upload/public/pdf/source/20211123/7AFDB03DAF68AA91648A852AAE26A3AB.pdf, Device=AR03FTDX4701A, Manufacturer Part=AR03FTDX4701A, Name=4.7kΩ, Supplier=LCSC, Supplier Footprint=0603, Supplier Part=C2924150, Symbol=AR03FTDX4701A, Type=薄膜电阻
SD??: JLCPCB Part Class="Extended Part", LCSC Part Name="拔插式 标准SD卡 卡座", Manufacturer=HANBO(汉博), Operating Temperature Range=-25℃~+90℃, Add into BOM=yes, Card Connection Mode=拔插式, Card Type=标准SD卡, Connector Type=卡座, Contact Plating=镀金, Convert to PCB=yes, Datasheet=https://atta.szlcsc.com/upload/public/pdf/source/20221111/3DA5FA45280C889584A9D758FC9BB3ED.pdf, Device=SD-112, Manufacturer Part=SD-112, Maximum Body Height=2.75mm, Supplier=LCSC, Supplier Footprint=SMD, Supplier Part=C961673, Symbol=SD-112
SW??: Actuator Color=-, Current Rating (DC)=2A, JLCPCB Part Class="Extended Part", Manufacturer="SHOU HAN(首韩)", Operating Temperature=-16℃~+60℃, Voltage Rating (DC)=125V, Actuator Style=-, Add into BOM=yes, Circuit=单刀双掷, Convert to PCB=yes, Current Rating (AC)=-, Datasheet=https://atta.szlcsc.com/upload/public/pdf/source/20210820/80D1704BBF3FCEE0435FCAA54C61E0A3.pdf, Device="SS12D10G4 071", LCSC Part Name="SS12D10G4 071", Manufacturer Part="SS12D10G4 071", Mechanical Life=3千次, Mounting Style=立插, Pin Style=PC引脚, Supplier=LCSC, Supplier Footprint=插件, Supplier Part=C2887259, Switch Height=6.4mm, Switch Length=12.7mm, Switch Width=6.7mm, Symbol="SS12D10G4 071", Voltage Rating (AC)=-
U5 U41: library part RTX032001BETP, "阻值:2kΩ;精度:±0.1%;", LCSC Part Name="2kΩ ±0.1%", Manufacturer=RALEC(旺诠), Temperature Coefficient=±50ppm/℃, Tolerance=±0.1%, Add into BOM=yes, Convert to PCB=yes, Datasheet=https://atta.szlcsc.com/upload/public/pdf/source/20220822/046AFDAF81466BFF443BF7BC902F6DB1.pdf, Device=RTX032001BETP, Manufacturer Part=RTX032001BETP, Name=2kΩ, Supplier=LCSC, Supplier Footprint=0603, Supplier Part=C5141181, Symbol=RTX032001BETP
U10: JLCPCB Part Class="Extended Part", Manufacturer=ISSI(美国芯成), Add into BOM=yes, Convert to PCB=yes, Datasheet=https://atta.szlcsc.com/upload/public/pdf/source/20130225/1457706593006.pdf, Device=IS62WV51216BLL-55TLI, LCSC Part Name=IS62WV51216BLL-55TLI, Manufacturer Part=IS62WV51216BLL-55TLI, Supplier=LCSC, Supplier Footprint=TSOPII-44, Supplier Part=C11315, Symbol=IS62WV51216BLL-55TLI
U11: "排数:双排;总孔位数:18P;间距:2.54mm;插孔结构:2x9P;行距:2.54mm;安装类型:直插;圆孔/方孔:方孔;额定电流:3A;额定电压:-;插孔方向:顶部;塑高:8.5mm;工作温度范围:-40℃~+105℃;", Current Rating (Max)=3A, JLCPCB Part Class=扩展库, LCSC Part Name="间距:2.54mm 2x9P 直插", Manufacturer=HCTL(华灿天禄), Operating Temperature Range=-40℃~+105℃, Voltage Rating (Max)=-, Add into BOM=yes, Circular Hole / Square Hole=方孔, Convert to PCB=yes, Datasheet=https://atta.szlcsc.com/upload/public/pdf/source/20230609/3D36CA2C1BFC9FD1C3F709AD9DFEB9C2.pdf, Device=PM254-2-09-Z-8.5, Holes Direction=顶部, Holes Structure=2x9P, Insulation Height=8.5mm, Manufacturer Part=PM254-2-09-Z-8.5, Mounting Type=直插, Name=PM254-2-09-Z-8.5, Number of Holes=18P, Number of Rows=双排, Pitch=2.54mm, Row Spacing=2.54mm, Supplier=LCSC, Supplier Footprint=插件,P=2.54mm, Supplier Part=C2897410, Symbol=PM254-2-09-Z-8.5
U12: Clock Frequency (fc)=-, JLCPCB Part Class="Basic Part", LCSC Part Name="W25Q128JVSIQ 编带", Manufacturer=WINBOND(华邦), Add into BOM=yes, Block Erase Time (tBE)=-, Convert to PCB=yes, Data Retention - TDR (Year)=-, Datasheet=https://atta.szlcsc.com/upload/public/pdf/source/20170316/1489627409956.pdf, Device=W25Q128JVSIQ, Interface Type=-, Manufacturer Part=W25Q128JVSIQ, Memory Size=128Mbit, Operating Temperature=-, Page Programming Time (Tpp)=-, Standby supply current=-, Supplier=LCSC, Supplier Footprint=SOP-8-208mil, Supplier Part=C97521, Supply Current (Erase)=-, Supply Current (Program)=-, Supply Current (Read)=-, Supply Voltage=-, Symbol=W25Q128JVSIQTR
U12: "功能类型:降压型;输入电压:-;输出电流(最大值):-;", Input Voltage=-, JLCPCB Part Class=基础库, Manufacturer=XLSEMI(芯龙), Add into BOM=yes, Convert to PCB=yes, Datasheet=https://atta.szlcsc.com/upload/public/pdf/source/20151126/1457707596805.pdf, Device=XL1509-5.0E1, Function=降压型, LCSC Part Name=XL1509-5.0E1, Manufacturer Part=XL1509-5.0E1, Name=XL1509-5.0E1, Number of Outputs=-, Output Current (Max)=-, Supplier=LCSC, Supplier Footprint=SOP-8, Supplier Part=C61063, Switching Frequency=-, Symbol=XL1509-5.0E1, Synchronous Rectification=-, Topology=-
U19: "输出类型:固定;输出极性:正;输出通道数:1;最大输入电压:18V;输出电压:3.3V;压差:1.3V@(1A);输出电流:1A;电源纹波抑制比(PSRR):60dB@(120Hz);工作温度:±150℃@(Tj);", Dropout Voltage=1.3V@(1A), JLCPCB Part Class=扩展库, LCSC Part Name="正 Vin=18V Vout=3.3V 1A 60dB@(120Hz)", Manufacturer=YONGYUTAI(永裕泰), Maximum Input Voltage=18V, Operating Temperature=±150℃@(Tj), Output Current=1A, Output Voltage=3.3V, Power Supply Rejection Ratio (PSRR)=60dB@(120Hz), Add into BOM=yes, Convert to PCB=yes, Datasheet=https://atta.szlcsc.com/upload/public/pdf/source/20210901/A75ADDE6A17DEE0002F2A58A8D1F3634.pdf, Device=AMS1117-3.3, Manufacturer Part=AMS1117-3.3, Name=AMS1117-3.3, Number of Outputs=1, Output Polarity=正, Output Type=固定, Supplier=LCSC, Supplier Footprint=SOT-223-3, Supplier Part=C2891839, Symbol=AMS1117-3.3_C2891839
U20 U21: library part ESK106M1HD11RRSNP-R, "容值:10uF;精度:±20%;额定电压:50V;纹波电流:-;等效串联电阻:-;", Equivalent Series Resistance(ESR)=-, JLCPCB Part Class=扩展库, LCSC Part Name="10uF ±20% 50V", Manufacturer="MAN YUE(万裕科技)", Rated Voltage=50V, Tolerance=±20%, Add into BOM=yes, Convert to PCB=yes, Datasheet=https://atta.szlcsc.com/upload/public/pdf/source/20190724/C406799_CDF11B2185D3B9C175922EABD678815E.pdf, Device=ESK106M1HD11RRSNP-R, L=11mm, Lead Spacing=-, Lifetime @ Temp=-, Manufacturer Part=ESK106M1HD11RRSNP-R, Name=10uF, Operating Temperature=-, Ripple Current=-, Supplier=LCSC, Supplier Footprint=插件, Supplier Part=C3015490, Symbol=ESK106M1HD11RRSNP-R, φD=5mm
U27 U28 U29 U44: library part C1608JB1C106M080AB, "容值:10uF;精度:±20%;额定电压:16V;材质(温度系数):JB;", LCSC Part Name="10uF ±20% 16V", Manufacturer=TDK, Temperature Coefficient=JB, Tolerance=±20%, Voltage Rated=16V, Add into BOM=yes, Convert to PCB=yes, Device=C1608JB1C106M080AB, Manufacturer Part=C1608JB1C106M080AB, Name=10uF, Supplier=LCSC, Supplier Footprint=0603, Supplier Part=C3866185, Symbol=C1608JB1C106M080AB
U35: "参考系列:XH;间距:2.54mm;插针结构:1x4P;排数:1;每排PIN数:4;行距:-;公母:公型插针;安装方式:直插;额定电流:3A;触头材质:黄铜;触头镀层:锡;工作温度范围:-25℃~+85℃;焊接温度(最大值):260℃;", Current Rating (Max)=3A, JLCPCB Part Class=扩展库, LCSC Part Name="系列:XH 间距:2.54mm 1x4P 直插", Manufacturer=Megastar(兆星), Operating Temperature Range=-25℃~+85℃, Welding Temperature (Max)=260℃, Add into BOM=yes, Contact Material=黄铜, Contact Plating=锡, Convert to PCB=yes, Datasheet=https://atta.szlcsc.com/upload/public/pdf/source/20230619/B529A2163E0159A644AB3383D208FB03.pdf, Device=ZX-XH2.54-4PZZ, Gender=公型插针, Manufacturer Part=ZX-XH2.54-4PZZ, Mounting Style=直插, Name=ZX-XH2.54-4PZZ, Number of PINs Per Row=4, Number of Rows=1, Pins Structure=1x4P, Pitch=2.54mm, Reference Series=XH, Row Spacing=-, Supplier=LCSC, Supplier Footprint=插件,P=2.54mm, Supplier Part=C7429634, Symbol=ZX-XH2.54-4PZZ
U36 U37 U38 U39: library part C1608CH2A180J080AA, "容值:18pF;精度:±5%;额定电压:100V;材质(温度系数):CH;", JLCPCB Part Class=扩展库, LCSC Part Name="18pF ±5% 100V", Manufacturer=TDK, Temperature Coefficient=CH, Tolerance=±5%, Voltage Rated=100V, Add into BOM=yes, Convert to PCB=yes, Device=C1608CH2A180J080AA, Manufacturer Part=C1608CH2A180J080AA, Name=18pF, Supplier=LCSC, Supplier Footprint=-, Supplier Part=C3847790, Symbol=C1608CH2A180J080AA
U40: "CPU内核:ARM Cortex-M4;CPU最大主频:168MHz;工作电压范围:1.8V~3.6V;程序存储容量:512KB;程序存储器类型:FLASH;RAM总容量:192KB;GPIO端口数量:114;", JLCPCB Part Class=扩展库, Low-Voltage Detect=有, Manufacturer=ST(意法半导体), Operating Temperature Range=-40℃~+85℃, Operating Voltage Range=1.8V~3.6V, ADC (Bit)=12bit, Add into BOM=yes, CCP Capture/Compare=-, communication protocol=-, Convert to PCB=yes, CPU Core="ARM Cortex-M4", CPU Maximum Speed=168MHz, DAC (Bit)=12bit, Datasheet=https://atta.szlcsc.com/upload/public/pdf/source/20160816/1471342957598.pdf, Device=STM32F407ZET6, Direct Memory Access=有, EEPROM=-, GPIO Ports Number=114, image=http://image.lceda.cn/szlcsc/C36869.jpg, Infrared Data Association=有, Internal Comparator=-, Internal Oscillator=有, LCD Module=有, LCSC Part Name=STM32F407ZET6, Manufacturer Part=STM32F407ZET6, Name=STM32F407ZET6, Program Memory Type=FLASH, Program Storage Size=512KB, PWM (Bit)=-, RAM Size=192KB, Real-Time Clock=-, Secure Digital Input and Output=-, Supplier=LCSC, Supplier Footprint=LQFP-144(20x20), Supplier Part=C36869, Symbol=STM32F407ZET6, tags=STM32, Universal Serial Bus=有, Watchdog=有
U42: library part C1608X8R2A103K080AA, "容值:10nF;精度:±10%;额定电压:100V;材质(温度系数):X8R;", LCSC Part Name="10nF ±10% 100V", Manufacturer=TDK, Temperature Coefficient=X8R, Tolerance=±10%, Voltage Rated=100V, Add into BOM=yes, Convert to PCB=yes, Device=C1608X8R2A103K080AA, Manufacturer Part=C1608X8R2A103K080AA, Name=10nF, Supplier=LCSC, Supplier Footprint=0603, Supplier Part=C3865495, Symbol=C1608X8R2A103K080AA
U43: "漏源电压(Vdss):20V;连续漏极电流(Id):2.3A;功率(Pd):700mW;类型:P沟道;导通电阻(RDS(on)@Vgs,Id):126mΩ@4.5V;", Continuous Drain Current (Id)=2.3A, Drain Source On Resistance (RDS(on)@Vgs,Id)=126mΩ@4.5V, Drain Source Voltage (Vdss)=20V, Gate Threshold Voltage (Vgs(th)@Id)=1V@250uA, Input Capacitance (Ciss@Vds)=285pF, JLCPCB Part Class=扩展库, LCSC Part Name="P沟道 耐压:20V 电流:2.3A", Manufacturer="HXY MOSFET(华轩阳电子)", Power Dissipation (Pd)=700mW, Add into BOM=yes, Convert to PCB=yes, Datasheet=https://atta.szlcsc.com/upload/public/pdf/source/20230515/2FF2907841563ED329594D3237822724.pdf, Device=SI2301-ZE, Manufacturer Part=SI2301-ZE, Name=SI2301-ZE, Supplier=LCSC, Supplier Footprint=SOT-23, Supplier Part=C5261052, Symbol=SI2301-ZE, Type=P沟道
X2: library part TAXM8M2QLFCDT1T, "频率:8MHz;频率公差:±30ppm;负载电容:20pF;", Equivalent Series Resistance (ESR)=80Ω, Frequency Stability=±20ppm, Frequency Tolerance=±30ppm, JLCPCB Part Class=扩展库, LCSC Part Name="8MHz ±30ppm 20pF", Load Capacitance=20pF, Manufacturer=TAE(雅晶鑫), Operating Temperature=-40℃~+85℃, Add into BOM=yes, Convert to PCB=yes, Crystal Type=贴片无源晶振, Datasheet=https://atta.szlcsc.com/upload/public/pdf/source/20220113/59EE8A0E7B9F67FF1BF3C454890DE4E5.pdf, Device=TAXM8M2QLFCDT1T, Manufacturer Part=TAXM8M2QLFCDT1T, Name=8MHz, Supplier=LCSC, Supplier Footprint=SMD5032-2P, Supplier Part=C122522, Symbol="SMD-5032_2P 8M 20pf 30ppm"
X3: library part TFX-04-32.768K, "频率:-;负载电容:-;", JLCPCB Part Class=扩展库, LCSC Part Name="时钟晶体 32.768kHz 4PF 20PPM", Manufacturer=RIVER(大河), Add into BOM=yes, Convert to PCB=yes, Crystal Type=-, Datasheet=https://atta.szlcsc.com/upload/public/pdf/source/20200917/C515346_EDFB4A3F7406CD145B2E2A90CB656616.pdf, Device=TFX-04-32.768K, Load Capacitance=-, Manufacturer Part=TFX-04-32.768K, Name=-, Operating Temperature=-, Supplier=LCSC, Supplier Footprint=SMD1610-2P, Supplier Part=C515348, Symbol=TFX-04-32.768K_C515348

## Via types
v1: diameter 16, hole 12, Top Layer to Bottom Layer, 187 vias

## Nets (pads, with @x,y where several pads share a name; then routed paths per layer and width w, separated by ;. In a path a pad name is that pad's centre, name@x,y a point inside that pad or via, vN(x,y) a via of type N, cw(c..) or ccw(c..) an arc to the next point about the centre after c; other vN are vias at no path point)
3V3: C2.2 C13.2 C25.2 C26.2 C37.1 C38.1 C39.1 C41.1 C100.2 C101.2 C103.2 C105.2 P1.1 P1.3 P1.5 P1.7 P11.24 P11.25 P100.9 R12.2 R15.2 R17.2 R18.2 R19.2 R100.1 R101.2 R102.2 R103.2 R104.2 R105.2 R110.2 R111.2 SD??.4 U10.11 U10.33 U11.1 U12.3@1388.98,2601 U12.7@1111.02,2551 U12.8@1111.02,2501 U19.2 U19.4 U27.1 U28.1 U29.1 U35.1 U40.6 U40.17 U40.30 U40.32 U40.33 U40.39 U40.52 U40.62 U40.72 U40.84 U40.95 U40.108 U40.121 U40.131 U40.144 U44.1 | length 28646.8
  Top Layer w10: R17.2@398.34,666 398.34,752.34 432,786 v1(432,788) ; R12.2@657.03,2079.97 656.23,2079.17 656.23,1985.77 704,1938 755,1938 v1(800,1893) 801.62,1893 804.64,1896.01 845.81,1896.01 U40.144@869.75,1872.07 ; R18.2@778,689 778,690.13 881.87,794 1101,794 1104.5,790.5 ; U40.6@939.35,1688.33 982.85,1731.83 982.85,1734.85 v1(984,1736) ; v1(994.89,2141.52) 994.89,2108.83 U40.131@1050.7,2053.03 1050.98,2053.03 1085.01,2019 1132,2019 v1(1141,2028) ; v1(1025,1471) 1026.15,1472.15 1029.39,1472.15 U40.17@1092.46,1535.22 ; R19.2@1042.66,656 1042.66,728.66 1104.5,790.5 ; U12.7@1111.02,2551 U12.8@1111.02,2501 1079.13,2501 1035.71,2457.58 1022.65,2457.58 C37.1@973.07,2408 U29.1@924.33,2359.26 ; C38.1@1185.59,1099.83 U28.1@1240.77,1044.65 ; U40.121@1189.9,2192.22 1046.12,2336 v1(995,2336) 973.13,2357.87 932.77,2357.87 931.38,2359.26 U29.1@924.33,2359.26 ; v1@1260,946 1104.5,790.5 ; 1275.81,1274.15 1227.15,1274.15 v1(1226,1273) 1226,1306.85 U40.30@1273.41,1354.26 1273.69,1354.26 1302.23,1382.8 1333.8,1382.8 1342,1391 1406.5,1391 U40.39@1498.91,1298.59 1541.67,1255.82 1541.67,1250.3 1675.97,1116 1862,1116 1906.78,1160.78 1906.78,1374.02 1905.38,1375.41 C41.1@1905.38,1390.61 ; 1276.81,1274.15 1314.83,1312.17 1314.83,1312.84 U40.32@1301.25,1326.42 ; U12.3@1388.98,2601 1468,2601 1498,2631 1498,2690 1528,2720 1613,2720 1651,2682 1651,2570 1499.14,2418.14 1495,2418.14 ; R15.2@1392.66,945 1427,945 ; v1(1400,2421) 1443.88,2421 1446.88,2424 1489.14,2424 1495,2418.14 ; U40.108@1471.07,2359.25 1495,2383.18 1495,2418.14 ; U40.95@1652.03,2178.3 1652.3,2178.3 1698.01,2224 1735.89,2224 1767.09,2192.8 1864,2192.8 ; U40.52@1679.87,1479.54 1768.79,1390.61 C41.1@1905.38,1390.61 ; U40.84@1805.14,2025.19 1829.27,2049.32 1829.27,2050.98 1833.67,2055.38 1833.67,2071.67 1864,2102 1864,2192.8 ; U40.62@1819.06,1618.74 1930.79,1507 1931.11,1507 1968.84,1469.27 1968.84,1454.07 U44.1@1967.45,1452.68 1937.11,1422.34 ; v1(1901,2205) 1901,2200 1893.8,2192.8 1864,2192.8 ; U40.72@1958.25,1757.93 1982.19,1733.99 2095.01,1733.99 2235,1594 v1(2235,1369) 2235.5,1368.5 2495.5,1368.5 v1(2496,1368) ; v1(1977,2289) 2007.51,2319.51 C39.1@2007.51,2321.51 2068.02,2261 U27.1@2068.02,2260.02 ; v1(2178,1216) 2143.46,1216 1937.11,1422.34 ; U29.1@924.33,2359.26 922.94,2357.87 U29.1@914.79,2357.87 916.18,2359.26 U29.1@924.33,2359.26 ; C41.1@1905.38,1390.61 1937.11,1422.34
  Top Layer w15: v1(89,2016) 89,2240.14 85,2244.14 85,2468 139,2522 139,2523.5 161.5,2546 U35.1@163,2546 ; U11.1@187,1804 187,1942.15 205.88,1961.03 C13.2@205.88,1963 205.88,2007.85 203,2010.73 v1(203,2011) ; U27.1@2068.02,2260.02 2079.69,2260.02 2097.52,2242.19 2110.81,2242.19 v1(2111,2242) ; U19.4@2087,3807.93 2164.93,3730 C25.2@2317,3730 ; v1(2238,2240) 2239,2241 3104,2241 ; C25.2@2317,3727.56 2397.56,3727.56 2397.56,3728.03 2404.22,3734.68 2404.68,3734.68 2554.53,3884.53 2562,3892 2959,3892 2976,3875 2976,3855 P1.7@2976,3822 P1.3@2976,3622 2976,3523 P1.1@2977,3522 ; v1(2496,1104) v1(2496,1368) 2496,1701 2560,1765 3236,1765 3282,1811 3282,2063 3104,2241 ; P11.24@2853,288 2853,299.92 2870.88,317.8 C103.2@2870.88,481 ; 3158.97,2961.97 3158.97,2368.97 P100.9@3104,2314 3104,2241 ; R111.2@3233,2636.66 3233,2699 3251,2717 3281.61,2717 ; R110.2@3321,2638.66 3321,2661
  Top Layer w25: v1(722,1080) 761,1041 761,989 804,946 v1@1260,946 ; U28.1@1240.77,1044.65 1240.77,1040.06 1262,1018.83 v1(1262,948) ; 1427,945 1531.64,840.36 2147,840.36 2147,840 2203,784 2362.5,784 2419.5,841 2595,841 v1(2673,919) 2693,939 3238,939 3554.03,1255.03 3554.03,2434.72 3449.58,2539.17 3449.58,2581.42 3392.34,2638.66 R110.2@3321,2638.66
  Top Layer w50: U19.2@2087,3574.07 U19.4@2087,3807.93 2214.07,3807.93 2268,3754 2402,3754 2532.53,3884.53 2554.53,3884.53 2946.47,3884.53 2976,3855 2977,3854 P1.1@2977,3522 ; 3158.97,2961.97 3231.5,3034.5 ; v1(3231.5,3306) 3231.5,3034.5 ; 3321,2661 3321,2677.61 3281.61,2717 3231.5,2767.11 3231.5,3034.5
  Bottom Layer w10: C100.2@926.86,1972.29 984,1915.15 v1(984,1736) 984,1510 1022,1472 1024,1472 v1(1025,1471) v1@1224.5,1271.5 ; 949,2286 v1@997,2334 ; v1(995,2336) 1037.15,2378.15 1037.15,2380.86 1078.14,2421.86 1079,2421 v1(1400,2421) ; v1@1139,2033 1139,2087 1175,2123 1231,2123 1277,2077 1277,1961 1301,1937 1361.4,1937 1419.01,1879.39 U10.11@1419.01,1857.68 ; v1(1901,2205) 1975.85,2279.85 1975.85,2287.85 v1(1977,2289) ; v1(2178,1216) 2178,1261.81 2172,1267.81 2172,1312 v1@2227.85,1367.85
  Bottom Layer w15: v1(203,2011) 202.73,2011 197.73,2016 v1(89,2016) 89,1894 43,1848 43,834 89,788 v1(432,788) 1165,788 1262,885 v1(1262,948) ; C100.2@926.06,1975.06 926.06,2053.94 C101.2@926,2054 926,2055.97 948,2077.97 R100.1@948,2130.34 946.87,2130.34 898,2179.21 898,2239 v1(995,2336) ; C100.2@926.12,1976.97 1006.07,2056.92 1006.07,2103.51 995.09,2114.5 995.09,2141.32 v1(994.89,2141.52) ; U10.33@1387.51,2303 1387.51,2408.24 1400,2420.73 v1(1400,2421) ; v1(2111,2242) 2113,2240 v1(2238,2240) ; v1(2492,1188) 2492.19,1187.81 2516.19,1187.81 2517,1187 R105.2@2565.34,1187 ; v1(2495,1564) 2561,1564 2562,1565 ; v1(2496,1104) 2496.27,1104 2501.27,1099 R102.2@2564.34,1099 ; v1(2496,1368) 2549.85,1314.15 2562.68,1314.15 ; R103.2@2561,1602 2562,1601 2562,1565 ; R101.2@2562.68,1272 2562.68,1314.15 ; R104.2@2563,1528 2562,1529 2562,1565 ; v1(2673,919) 2853,739 P11.24@2853,288 P11.25@2953,188 ; SD??.4@2834.57,1274.41 2712.18,1274.41 2617.56,1369.03 2562.68,1314.15
  Bottom Layer w25: v1(722,1080) 640,1162 640,1733 v1(800,1893) ; v1(1262,948) 1265,951 1425,951 v1(1456,920)
  Bottom Layer w50: P1.1@2977,3522 3193,3306 v1(3231.5,3306)
+5V: C1.2 C23.2 C27.2 C102.2 C106.1 C107.1 GSM.2 H2.1 L1.2 P2.1 P2.3 P2.5 P2.7 P11.28 P100.12 Q5.2 Q6.3 R24.2 R51.2 R52.2 SW??.2 SW??.3 U12.3@807.53,3598.37 U19.3 U20.1 U21.1 U43.2 | length 12055.7